# Altium PCB TIDA-010954-RevB.PcbDoc (part 8 of 8)
Units mm, origin at the board's own origin, x right, y up, seen from the top; angles counter-clockwise.
Board outline 290 x 100 mm, 6 copper layers (Top Layer, Mid1, Mid2, Mid3, Mid4, Bottom Layer), stack 1.59 mm thick; 394 components, 204 nets, 1137 pads, 2188 vias.
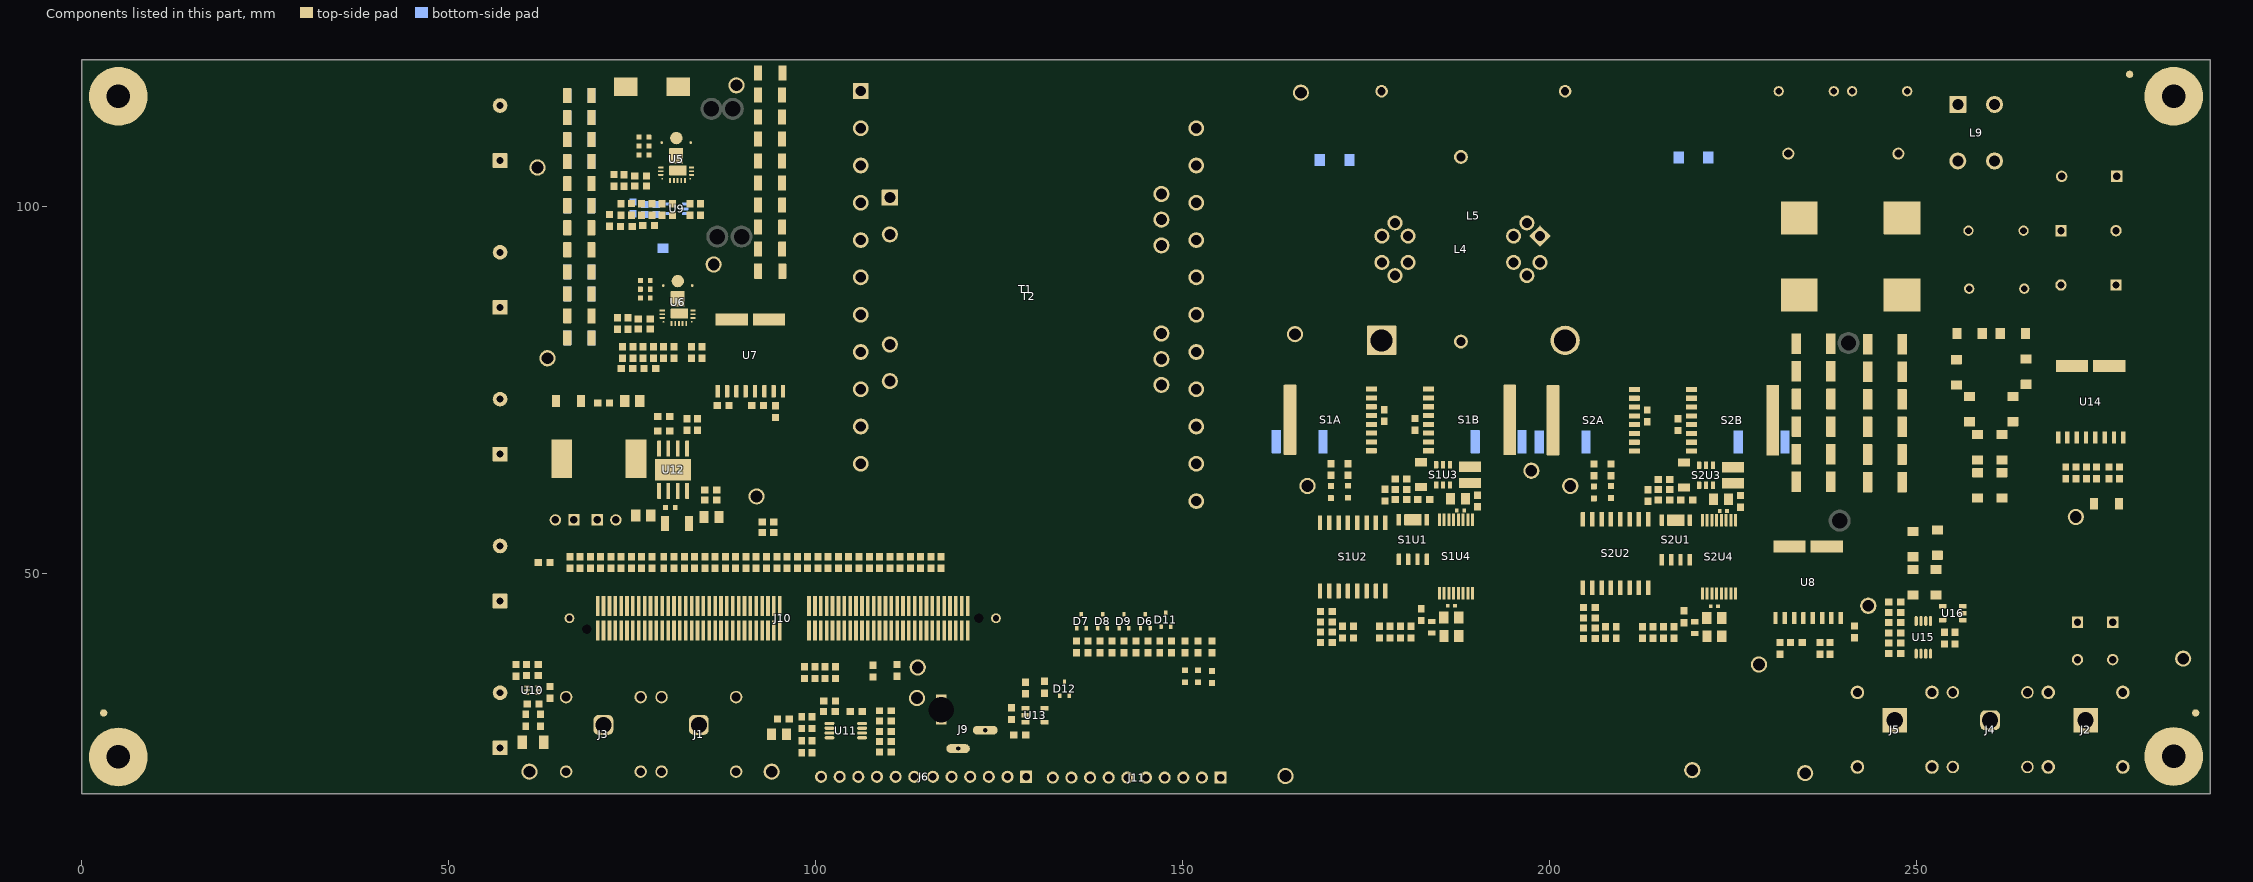
[diagram p10: the components of this part, seen from the top]

## Other copper
Top Layer:
  region net SW_L1: 82.8,106.2 85.383,106.2 90.7,111.517 90.7,114.9 85.3,114.9 82.8,112.4
  region net SW_L1: 93.1,90.2 93.1,119.2 90.6,119.2 90.6,111.769 85.4,106.569 85.4,94.3 87.1,94.3 91.2,90.2
  region net T1_1: 99.5,119.2 104.7,114 112,114 112,92.2 104.975,92.2 102.975,90.2 94.4,90.2 94.4,119.2
  region net SW_L2: 90.8,83.7 90.8,89.6 87.1,93.3 83,93.3 83,86.7 85.1,86.7 86.3,85.5 86.3,83.7
  region net T1_2: 91.3,83.7 91.3,89.5 103.9,89.5 104.975,88.425 112,88.425 112,68.6 103.1,68.6 97.3,74.4 97.3,83.3 96.9,83.7 93.2,83.7
  region net PGND: 65.3,80.4 67.1,80.4 67.1,116.5 65.3,116.5
  region net PGND: 58.1,27.3 58.1,25.2 55.9,25.2 55.9,27.3
  region net PVIN: 79.3,119 79.3,113.8 79.5,113.6 83.05,113.6 84.6,115.15 84.6,119
  region net DAB_POWER: 68.8,101.4 69.018,101.182 70.8,101.182 70.8,95 70.7,94.9 68.8,94.9
  region net DAB_POWER: 79.6,92.918 79.6,93.918 79.3,94.218 79.3,95.2 68.8,95.2 68.8,80.3 71.9,80.3 71.9,86.018 73.1,86.018 74.6,87.518 74.6,92.918
  region net DAB_POWER: 79.4,112.4 79.4,113.4 79.1,113.7 79.1,119 68.8,119 68.8,100.7 70.8,100.7 71.4,101.3 71.4,105.5 72.5,105.5 74.4,107.4 74.4,112.4
  region net PGND: 82.2,90.818 82.2,92.918 80.2,92.918 80.2,90.818
  region net DAB_POWER: 79.6,86.7 77.3,86.7 77.1,86.9 77.1,90.742 76.942,90.9 74.6,90.9 74.6,92.918 79.6,92.918
  region net PGND: 82,110.3 82,112.4 80,112.4 80,110.3
  region net DAB_POWER: 79.4,106.182 77.1,106.182 76.9,106.382 76.9,110.1 76.6,110.4 74.4,110.4 74.4,112.4 79.4,112.4
  region net PGND: 76.3,106.182 76.3,109.794 75,109.794 75,106.182
  pour cut-out: 77.9,72.5 77.8,72.4 62.9,72.4 62.9,58.7 77.9,58.7
  region net PGND: 60.4,25.4 60.4,27.9 59.68,28.8 58.8,28.8 58.8,25.4
  region net S1DA: 165.4,66.1 161,66.1 161,78.4 165.4,78.4
  region net S1DA: 247.3,90.2 247.3,61 249,61 251,63 251,90.2
  region net S2DB: 234.3,61 234.3,90.2 230.6,90.2 230.6,61
  region net S1S_SRC: 187.636,56.469 187.636,61.269 186.136,61.269 185.236,60.369 185.236,59.969 185.536,59.669 185.536,59.269 184.736,58.469 184.736,56.469
  region net GND: 186.772,40.446 189.772,40.446 189.772,48.146 186.772,48.146
  region net NetS1C13_2: 185.372,45.546 184.872,45.046 184.872,43.146 185.372,43.146 186.472,43.146 186.472,48.146 185.372,48.146
  region net S2DA: 205,84.3 205,79.2 191.4,79.2 191.4,84.3
  region net S2DA: 201.069,76.3 194,76.3 194,66.3 201.069,66.3
  region net N_M: 273.3,77.5 273.3,82.1 269,82.1 269,77.5
  region net NetF2_1: 274.1,77.5 274.1,90.1 274.9,90.9 275.1,90.9 278.3,90.9 278.4,90.8 278.4,77.5
  region net NetS2C13_2: 221.2,45.5 220.7,45 220.7,43.1 221.2,43.1 222.3,43.1 222.3,48.1 221.2,48.1
  region net GND: 222.6,40.4 225.6,40.4 225.6,48.1 222.6,48.1
  region net PVRTN: 63.1,28.525 63.4,28.825 63.4,29.4 66,32 74,32 74,24.2 63.8,24.2 63.1,24.9
  region net NetC100_2: 78.77,66.3 77.8,66.3 76.429,64.929 74.27,64.929 74.27,68.029 78.77,68.029
  region net MidHV: 239.9,53.8 239.9,52.9 235.5,52.9 235.5,55.7 235.5,57.5 237.6,59.6 237.6,61.1 244.2,61.1 244.2,60.6
  region net T1_4: 234.9,52.9 234.9,57.9 229.5,57.9 229.5,54.8 230.5,53.8 230.5,52.9
  region net MidHV: 244.2,61 237.6,61 237.6,82.7 244.2,82.7
  region net NetS1L1_1: 186.136,65.269 186.336,65.469 190.636,65.469 190.636,63.869 186.336,63.869 186.136,64.069
  region net S1S_5V: 189.936,62.969 189.936,60.469 189.436,59.969 189.436,58.469 189.636,58.269 189.636,56.469 188.036,56.469 188.036,58.969 187.936,59.083 187.936,61.269 187.636,61.569 186.136,61.569 186.136,62.969
  region net NetS2L1_1: 221.964,65.223 222.164,65.423 226.464,65.423 226.464,63.823 222.164,63.823 221.964,64.023
  region net S2S_5V: 225.764,62.923 225.764,60.423 225.264,59.923 225.264,58.423 225.464,58.223 225.464,56.423 223.864,56.423 223.864,58.923 223.764,59.037 223.764,61.223 223.464,61.523 221.964,61.523 221.964,62.923
  region net S2S_SRC: 223.464,56.423 223.464,61.223 221.964,61.223 221.064,60.323 221.064,59.923 221.364,59.623 221.364,59.223 220.564,58.423 220.564,56.423
  pour cut-out: 61.6,30 61.6,26.5 60.9,25.8 60.4,25.8 60.4,27.9 59.8,28.5 59.8,30
  region net PGND: 76.5,86.7 76.5,90.3 75.2,90.3 75.2,86.7
  text ".Layer_Name" at 14.656,-21.806 h1.52
Mid1:
  region net T1_2: 91.3,83.7 91.3,89.5 103.9,89.5 104.7,88.7 112,88.7 112,68.5 103,68.5 98.1,73.4 98.1,83 97.4,83.7 93.2,83.7
  pour cut-out: 83,93.208 85.4,95.108 85.4,105.916 82.8,105.916 82.8,112.4 89.9,119.5 112,119.5 112,67 102,67 97,72 97,83 88.902,83.098 83,89
  region net SW_L1: 82.8,106.2 85.256,106.2 90.4,111.344 90.4,114.9 85.3,114.9 82.8,112.4
  region net SW_L1: 93.1,90.2 93.1,119.175 90.6,119.175 90.6,111.116 85.4,105.916 85.4,94.3 87.1,94.3 91.2,90.2
  region net SW_L2: 90.8,83.7 90.8,89.6 87.1,93.3 83,93.3 83,86.7 85.1,86.7 86.3,85.5 86.3,83.7
  region net T1_1: 99.5,119.2 104.7,114 112,114 112,91.8 103.6,91.8 102,90.2 94.5,90.2 94.5,119.2
  pour cut-out: 77.9,72.5 77.8,72.4 62.9,72.4 62.9,58.7 77.9,58.7
  region net T1_3: 154.1,80.4 149.1,85.4 149.1,88 144,88 144,62.7 154.1,62.7
  region net PVRTN: 62.3,28.3 63.4,29.4 66,32 74,32 74,24.2 63.8,24.2 62.3,25.7
  pour cut-out: 162,70.5 162,78 231.5,78 231.5,70.5
  region net T1_3: 176.7,93.8 175.7,92.8 175.7,91.8 178.4,89.1 179.5,89.1 180.3,89.9 180.3,91 177.5,93.8
Mid2:
  region net SW_L2: 90.8,83.7 90.8,89.6 87.1,93.3 83,93.3 83,86.7 85.1,86.7 86.3,85.5 86.3,83.7
  region net T1_2: 91.3,83.7 91.3,89.5 103.9,89.5 104.7,88.7 112,88.7 112,68.5 103,68.5 98.1,73.4 98.1,83 97.4,83.7 93.2,83.7
  region net SW_L1: 93.1,90.2 93.1,119.2 90.6,119.2 90.6,111.769 85.4,106.569 85.4,94.3 87.1,94.3 91.2,90.2
  region net SW_L1: 82.8,106.2 85.383,106.2 90.7,111.517 90.7,114.9 85.3,114.9 82.8,112.4
  region net T1_1: 99.5,119.2 104.7,114 112,114 112,92.2 104.975,92.2 102.975,90.2 94.4,90.2 94.4,119.2
  region net PGND: 55.404,29.156 60.004,29.156 60.604,28.556 60.604,25.056 60.004,24.456 55.404,24.456
  region net PVIN: 56,114.8 56,112.7 58,112.7 58,114.8
  pour cut-out: 83,93.208 85.4,95.108 85.4,105.916 82.8,105.916 82.8,112.4 89.9,119.5 112,119.5 112,67 102,67 97,72 97,83 88.902,83.098 83,89
  pour cut-out: 77.9,72.5 77.8,72.4 62.9,72.4 62.9,58.7 77.9,58.7
  pour cut-out: 162,70.5 162,78 231.5,78 231.5,70.5
  region net PVIN: 82,32 86,32 86,27 82,27
Mid3:
  region net SW_L1: 82.8,106.2 85.383,106.2 90.7,111.517 90.7,114.9 85.3,114.9 82.8,112.4
  region net SW_L1: 93.1,90.2 93.1,119.2 90.6,119.2 90.6,111.769 85.4,106.569 85.4,94.3 87.1,94.3 91.2,90.2
  region net T1_1: 99.5,119.2 104.7,114 112,114 112,92.2 104.975,92.2 102.975,90.2 94.4,90.2 94.4,119.2
  region net T1_2: 91.3,83.7 91.3,89.5 103.9,89.5 104.7,88.7 112,88.7 112,68.5 103,68.5 98.1,73.4 98.1,83 97.4,83.7 93.2,83.7
  region net SW_L2: 90.8,83.7 90.8,89.6 87.1,93.3 83,93.3 83,86.7 85.1,86.7 86.3,85.5 86.3,83.7
  region net PVIN: 56,34.9 56,32.3 58.2,32.3 58.2,34.9
  region net PGND: 55.4,29.2 60,29.2 60.6,28.6 60.6,25.1 60,24.5 55.4,24.5
  pour cut-out: 83,93.208 85.4,95.108 85.4,105.916 82.8,105.916 82.8,112.4 89.9,119.5 112,119.5 112,67 102,67 97,72 97,83 88.902,83.098 83,89
  pour cut-out: 83,93.208 85.4,95.108 85.4,105.916 82.8,105.916 82.8,112.4 89.9,119.5 112,119.5 112,67 102,67 97,72 97,83 88.902,83.098 83,89
  region net PVIN: 82.1,31.2 85.9,31.2 85.9,27.5 82.1,27.5
  region net S1DA: 247.3,82.7 247.3,61 251,61 251,82.7
  region net N_M: 273.3,77.5 273.3,82.1 269,82.1 269,77.5
Mid4:
  region net T1_1: 99.5,119.2 104.7,114 112,114 112,92.2 104.975,92.2 102.975,90.2 94.4,90.2 94.4,119.2
  region net T1_2: 91.3,83.7 91.3,89.5 103.9,89.5 104.975,88.425 112,88.425 112,68.6 103.1,68.6 97.3,74.4 97.3,83.3 96.9,83.7 93.2,83.7
  region net SW_L2: 90.8,83.7 90.8,89.6 87.1,93.3 83,93.3 83,86.7 85.1,86.7 86.3,85.5 86.3,83.7
  region net SW_L1: 93.1,90.2 93.1,119.2 90.6,119.2 90.6,111.769 85.4,106.569 85.4,94.3 87.1,94.3 91.2,90.2
  region net SW_L1: 82.8,106.2 85.383,106.2 90.7,111.517 90.7,114.9 85.3,114.9 82.8,112.4
  region net PVIN: 56,34.8 56,32.7 58,32.7 58,34.8
  region net PGND: 56,47.3 56,45.2 58,45.2 58,47.3
  region net PVIN: 56,54.8 56,52.7 58,52.7 58,54.8
  region net PGND: 56,67.3 56,65.2 58,65.2 58,67.3
  region net PVIN: 56,74.8 56,72.7 57.5,72.7 57.5,74.8
  region net PGND: 56,87.3 56,85.2 58,85.2 58,87.3
  region net PVIN: 56,94.8 56,92.7 57.204,92.7 57.204,94.8
  region net PGND: 56,107.3 56,105.2 58,105.2 58,107.3
  region net PVIN: 56,114.8 56,112.7 58,112.7 58,114.8
  pour cut-out: 83,93.208 85.4,95.108 85.4,105.916 82.8,105.916 82.8,112.4 89.9,119.5 112,119.5 112,67 102,67 97,72 97,83 88.902,83.098 83,89
  region net T1_4: 144,88.7 153.8,88.7 153.8,108.7 144,108.7
  region net PVIN: 85.7,31.2 85.7,27.7 82.4,27.7 82.4,31.2
Bottom Layer:
  region net T1_2: 91.3,83.7 91.3,89.5 103.9,89.5 104.975,88.425 112,88.425 112,68.6 103.1,68.6 97.3,74.4 97.3,83.3 96.9,83.7 93.2,83.7
  region net SW_L2: 90.8,83.7 90.8,89.6 87.1,93.3 83,93.3 83,86.7 85.1,86.7 86.3,85.5 86.3,83.7
  region net T1_1: 99.5,119.2 104.7,114 112,114 112,92.2 104.975,92.2 102.975,90.2 94.4,90.2 94.4,119.2
  region net SW_L1: 93.1,92.3 93.1,119.2 90.6,119.2 90.6,111.35 85.4,106.15 85.4,94.3 87.1,94.3 89.1,92.3
  region net SW_L1: 83,106.2 85.633,106.2 90.7,111.267 90.7,114.9 85.3,114.9 83,112.6
  region net PGND: 65.3,83.75 67.027,83.75 67.027,80.5 65.3,80.5
  region net PGND: 65.3,89.75 67.027,89.75 67.027,86.5 65.3,86.5
  region net PGND: 65.3,92.75 67.027,92.75 67.027,89.5 65.3,89.5
  region net PGND: 65.3,101.75 67.027,101.75 67.027,98.5 65.3,98.5
  region net PGND: 65.3,116.385 66.96,116.385 66.96,104.345 65.3,104.345
  region net DAB_POWER: 68.75,101.75 70,101.75 70,98.5 68.75,98.5
  region net DAB_POWER: 68.75,83.75 70,83.75 70,80.5 68.75,80.5
  region net DAB_POWER: 70.1,92.9 68.7,92.9 68.7,86.25 70.1,86.25
  region net DAB_POWER: 68.7,116.3 70.2,116.3 70.2,104.345 68.7,104.345
  pour cut-out: 83,93.208 85.4,95.108 85.4,105.916 82.8,105.916 82.8,112.4 89.9,119.5 112,119.5 112,67 102,67 97,72 97,83 88.902,83.098 83,89
  region net S1S_SRC: 168.572,69.946 168.572,66.046 170.172,66.046 170.172,69.946
  region net S1S_SRC: 190.4,65.972 190.4,69.872 188.8,69.872 188.8,65.972
  region net S1S_SRC: 168.572,69.946 168.572,66.046 170.172,66.046 170.172,69.946
  region net S1DA: 165.4,66.1 157,66.1 157,78.4 165.4,78.4
  region net S1S_SRC: 190.4,65.972 190.4,69.872 188.8,69.872 188.8,65.972
  region net S2DB: 235.5,61 235.5,89.9 229.765,89.9 229.765,61
  region net S2DA: 191.3,84.8 205.2,84.8 205.2,80.9 201.2,76.8 201.2,65.8 193.8,65.8 193.8,76.8 191.3,79.3
  region net PVRTN: 63.1,28.525 63.1,29.1 66,32 74,32 74,24.2 63.8,24.2 63.1,24.9
  text ".Layer_Name" at 14.656,-21.806 h1.52

## Silkscreen, mask and mechanical layers (free items; w line width, h text height)
Top Overlay:
  drawing of 227 lines, arcs and shapes, not listed
  text "+" at 56.8,115.7 h0.6
  text "-" at 56.8,103.7 h0.6
  text "+" at 56.8,95.7 h0.6
  text "Danger High Voltage" at 284.066,88.8 h2 r270
  text "-" at 56.8,83.7 h0.6
  text "+" at 56.8,75.7 h0.6
  text "-" at 56.8,63.7 h0.6
  text "+" at 56.8,55.7 h0.6
  text "230VAC 4A max" at 257.9,46.9 h2
  text "-" at 56.8,43.7 h0.6
  text "60V 16A max" at 67.6,37.4 h2
  text "+" at 56.8,35.7 h0.6
  text "-" at 70.6,35.1 h2
  text "+" at 83.5,35.067 h2
  text "'.PRJ_Number'.PCB_Rev" at 220.2,27.6 h1.5
  text "-" at 53.8,23.7 h0.6
  text ".Layer_Name" at 14.656,-21.806 h1.52
Bottom Overlay:
  lines w0.1: 85.3,106 90.5,111.2 90.5,115
  text ".Layer_Name" at 14.656,-21.806 h1.52
Top Paste:
  text ".Layer_Name" at 14.656,-21.806 h1.52
Bottom Paste:
  text ".Layer_Name" at 14.656,-21.806 h1.52
Top Solder:
  region: 98,117 98,92 100,92 100,117
  region: 78.6,87.318 78,87.318 78,90.418 77.2,91.218 74.8,91.218 74.8,92.5 78.6,92.5
  region: 92,89 92,87 97,87 99,85 99,72 102,69 103,69 103,88 102,89
  region: 85,90 89,90 90,89 90,86 87,86 87,87 86,88 85,88
  region: 78.4,106.8 77.8,106.8 77.8,109.9 77,110.7 74.6,110.7 74.6,112 78.4,112
  region: 239.1,60.4 239.1,61.6 242.5,61.6 242.5,60.4
  text ".Layer_Name" at 14.656,-21.806 h1.52
  text ".Layer_Name" at 14.656,-21.806 h1.52
Bottom Solder:
  text ".Layer_Name" at 14.656,-21.806 h1.52
Drill Guide:
  text ".Layer_Name" at 14.656,-21.806 h1.52
M1 Board Outline:
  the board outline again, w0.254
  text ".Layer_Name" at 14.656,-21.806 h1.52
M2 Board Dimensions:
  rectangle: 0,-6.985 3.175,-3.81
  rectangle: 3.175,-10.16 12.7,-6.985
  lines w0.178: 0,-6.985 25.4,-6.985 ; 3.175,-10.16 3.175,-3.81 ; 6.35,-10.16 6.35,-3.81 ; 12.7,-10.16 12.7,-3.81 ; 19.05,-10.16 19.05,-3.81 ; 0,-10.16 25.4,-10.16 25.4,-3.81 0,-3.81 0,-10.16
  text ".Layer_Name" at 14.656,-21.806 h1.52
M3 3D STEP Top:
  text ".Layer_Name" at 14.656,-21.806 h1.52
M4 3D STEP Bottom:
  text ".Layer_Name" at 14.656,-21.806 h1.52
M5 Assembly Top:
  lines w0.254: -7.417,-23.626 160.223,-23.626 ; -7.417,-18.462 160.274,-18.462 ; -7.417,-13.297 -7.417,-28.791 94.31,-28.791 160.274,-28.791 160.274,-13.297 -7.404,-13.297 -7.404,-28.791 32.614,-28.791 ; 55.194,-28.791 55.194,-13.297 ; 87.376,-18.462 87.376,-13.297 ; 108.712,-18.462 108.712,-13.297 ; 124.511,-28.956 124.511,-23.804
  text "COMPONENTS MARKED 'DNP' SHOULD NOT BE POPULATED." at 29.299,-8.09 h1.52
  text "ASSEMBLY VARIANT:" at 29.286,-11.024 h1.52
  text ".VariantName" at 55.601,-11.024 h1.52
  text "PCB VIEWED FROM TOP SIDE" at -5.804,-16.654 h1.52
  text "BOARD #:" at 57.099,-16.654 h1.52
  text ".PRJ_Number" at 70.955,-16.654 h1.52
  text "REV:" at 92.405,-16.654 h1.52
  text ".PCB_Rev" at 99.809,-16.654 h1.52
  text "SVN REV:" at 113.69,-16.654 h1.52
  text ".VersionControl_RevNumber" at 126.543,-16.654 h1.52
  text "TID #:" at 57.099,-21.819 h1.52
  text ".TID" at 70.955,-21.819 h1.52
  text "PLOT NAME =" at -5.804,-27.034 h1.52
  text ".plot_File_Name" at 14.656,-27.034 h1.52
  text "GENERATED    :" at 57.15,-27.034 h1.52
  text ".Print_Date" at 79.235,-27.034 h1.52
  text ".Print_Time" at 97.752,-27.034 h1.52
  text "TEXAS INSTRUMENTS" at 129.87,-27.034 h1.52
M6 Assembly Bottom:
  lines w0.254: -7.429,-18.474 160.261,-18.474 ; -7.379,-23.639 160.261,-23.639 ; 28.334,-28.969 28.334,-23.817 ; 44.133,-18.474 44.133,-13.31 ; 65.468,-18.474 65.468,-13.31 ; 97.65,-28.804 97.65,-13.31 ; 120.231,-28.804 160.249,-28.804 160.249,-13.31 -7.429,-13.31 -7.429,-28.804 58.534,-28.804 160.261,-28.804 160.261,-13.31
  text "COMPONENTS MARKED 'DNP' SHOULD NOT BE POPULATED." at 154.991,-8.077 h1.52
  text ".VariantName" at 128.473,-11.024 h1.52
  text "ASSEMBLY VARIANT:" at 154.864,-11.024 h1.52
  text ".VersionControl_RevNumber" at 26.302,-16.667 h1.52
  text "SVN REV:" at 39.154,-16.667 h1.52
  text ".PCB_Rev" at 53.035,-16.667 h1.52
  text "REV:" at 60.439,-16.667 h1.52
  text ".PRJ_Number" at 81.89,-16.667 h1.52
  text "BOARD #:" at 95.745,-16.667 h1.52
  text "PCB VIEWED FROM BOTTOM SIDE" at 158.648,-16.667 h1.52
  text ".TID" at 81.89,-21.831 h1.52
  text "TID #:" at 95.745,-21.831 h1.52
  text "TEXAS INSTRUMENTS" at 22.974,-27.047 h1.52
  text ".Print_Time" at 55.093,-27.047 h1.52
  text ".Print_Date" at 73.609,-27.047 h1.52
  text "GENERATED    :" at 95.694,-27.047 h1.52
  text ".plot_File_Name" at 138.189,-27.047 h1.52
  text "PLOT NAME =" at 158.648,-27.047 h1.52
M9 Title Sheet:
  drawing of 57 lines, arcs and shapes, not listed
  text "1" at 18.792,204.127 h1.78
  text "2" at 82.182,204.127 h1.78
  text "3" at 145.411,204.127 h1.78
  text "4" at 209.08,204.127 h1.78
  text "5" at 272.555,204.127 h1.78
  text "6" at 336.182,204.127 h1.78
  text "A" at -10.579,175.095 h1.78
  text "A" at 365.341,175.095 h1.78
  text "B" at -10.579,114.643 h1.78
  text "B" at 365.341,114.643 h1.78
  text "C" at -10.579,54.318 h1.78
  text "C" at 365.341,54.318 h1.78
  text "PROJECT TITLE:" at 288.125,7.048 h1.14
  text ".PRJ_Title" at 289.395,3.662 h1.78
  text "DESIGNED FOR:" at 288.125,-0.597 h1.14
  text ".PRJ_Customer" at 289.395,-4.153 h1.78
  text "D" at -10.579,-5.88 h1.78
  text "D" at 365.341,-5.88 h1.78
  text "FILE NAME:" at 288.125,-8.217 h1.14
  text ".PCB_File_Name_No_Path" at 289.395,-11.265 h1.78
  text "Texas Instruments (TI) and/or its licensors do not warrant the accuracy or completeness of this specification" at 161.9,-15.376 h1.14
  text "ENGINEER:" at 288.125,-15.583 h1.14
  text "LAYOUT BY:" at 326.352,-15.583 h1.14
  text "or any information contained therein. TI and/or its licensors do not warrant that this design will meet" at 160.757,-18.237 h1.14
  text ".PRJ_Engineer" at 289.395,-19.52 h1.78
  text ".PCB_Layout" at 327.635,-19.52 h1.78
  text "the specifications, will be suitable for your application or fit for any particular purpose, or will operate in" at 160.757,-21.099 h1.14
  text ".Layer_Name" at 14.656,-21.806 h1.52
  text "ALTIUM DESIGNER VERSION:" at 326.352,-23.457 h1.14
  text "an implementation. TI and/or its licensors do not warrant that the design is production worthy. You should" at 160.757,-23.961 h1.14
  text "completely validate and test your design implementation to confirm the system functionality for your application." at 161.9,-26.822 h1.14
  text ".print_Scale" at 289.395,-26.843 h1.78
  text ".Application_BuildNumber" at 327.635,-26.843 h1.78
  text "1" at 18.792,-32.093 h1.78
  text "2" at 82.182,-32.093 h1.78
  text "3" at 145.411,-32.093 h1.78
  text "4" at 209.08,-32.093 h1.78
  text "5" at 272.555,-32.093 h1.78
  text "6" at 336.182,-32.093 h1.78
M10 Fab Notes:
  drawing of 189 lines, arcs and shapes, not listed
  text "DESIGN INFORMATION" at 314.503,161.447 h1.52
  text "MIN. TRACK WIDTH:" at 298.131,158.091 h1.52
  text "8" at 325.976,158.091 h1.52
  text "MIL" at 329.907,158.091 h1.52
  text "7.874" at 321.75,155 h1.52
  text "MIN. CLEARANCE:" at 298.131,154.938 h1.52
  text "MIL" at 329.907,154.938 h1.52
  text "MIN. VIA PAD SIZE:" at 298.131,151.785 h1.52
  text "24" at 325.214,151.785 h1.52
  text "MIL" at 329.907,151.785 h1.52
  text "0.05mm (2MIL)" at 315.784,148.486 h1.52
  text "MINIMUM ANNULAR RING" at 289.769,148.277 h1.52
  text "EXTERNAL" at 333.768,148.277 h1.52
  text "PER" at 294.849,145.48 h1.52
  text "IPC-D-275 CLASS 2 LEVEL C" at 300.437,145.48 h1.52
  text "MIL, HOLES" at 338.238,142.928 h1.52
  text "+/-" at 328.27,142.709 h1.52
  text "+/-" at 349.961,142.709 h1.52
  text "REGISTRATION TOLERANCES:" at 289.769,142.682 h1.52
  text "METAL" at 320.243,142.682 h1.52
  text "5" at 334.879,142.683 h1.52
  text "3" at 356.037,142.683 h1.52
  text "MIL" at 358.99,142.682 h1.52
  text "HOLE SIZE TOLERANCE (UNLESS OTHERWISE SPECIFIED):" at 289.769,140.185 h1.52
  text "+/-" at 349.961,140.112 h1.52
  text "3" at 356.037,140.085 h1.52
  text "MIL" at 358.99,140.085 h1.52
  text "MATERIAL:" at 287.87,136.589 h1.52
  text "FR-4 High Tg" at 312.926,133.324 h1.52
  text "X" at 309.257,133.122 h1.52
  text "FR-4" at 298.563,133.007 h1.52
  text "OTHER" at 336.358,133.007 h1.52
  text "62 MIL (1.6mm) +/-10%" at 306.694,129.374 h1.52
  text "X" at 303.643,129.312 h1.52
  text "THICKNESS:" at 289.769,129.165 h1.52
  text "OTHER" at 339.33,129.165 h1.52
  text "TOLERANCE:" at 289.769,125.652 h1.52
  text "X" at 311.314,125.652 h1.52
  text "ANSI IPC-6012 TYPE 3 CLASS 2" at 315.836,125.652 h1.52
  text "OTHER +/-" at 315.835,121.989 h1.52
  text "BOW & TWIST:" at 289.769,118.302 h1.52
  text "X" at 311.314,118.302 h1.52
  text "ANSI IPC-6012 TYPE 3 CLASS 2" at 315.836,118.302 h1.52
  text "OTHER +/-" at 315.835,114.576 h1.52
  text "DRILLING:" at 287.87,111.258 h1.52
  text "NC_DRILL FILES" at 332.599,108.586 h1.52
  text "REFERENCE:" at 289.769,108.486 h1.52
  text "X" at 306.463,108.484 h1.52
  text "AS SHOWN" at 310.984,108.486 h1.52
  text "X" at 329.348,108.486 h1.52
  text "OTHER" at 340.168,104.873 h1.52
  text "PTH COPPER THICKNESS:" at 289.761,104.783 h1.52
  text "X" at 318.697,104.783 h1.52
  text "20-30 um" at 321.948,104.783 h1.52
  text "BOARD FINISH:" at 287.87,101.034 h1.52
  text "SILKSCREEN:" at 291.812,98.237 h1.52
  text "X" at 316.14,98.237 h1.52
  text "TOP" at 319.112,98.237 h1.52
  text "X" at 329.094,98.237 h1.52
  text "BOTTOM" at 332.091,98.237 h1.52
  text "SILKSCREEN COLOR:" at 291.812,94.295 h1.52
  text "X" at 316.115,94.295 h1.52
  text "WHITE" at 319.112,94.295 h1.52
  text "OTHER" at 332.091,94.295 h1.52
  text "X" at 319.442,90.652 h1.52
  text "GREEN" at 322.439,90.652 h1.52
  text "OTHER" at 338.136,90.652 h1.52
  text "SOLDER RESIST COLOR:" at 291.812,90.477 h1.52
  text "X" at 319.442,86.734 h1.52
  text "MATTE" at 322.439,86.734 h1.52
  text "SEMI-GLOSS" at 338.125,86.717 h1.52
  text "IMMERSION GOLD (ENIG)" at 314.819,82.345 h1.52
  text "ENEPIG" at 348.793,82.162 h1.52
  text "SURFACE FINISH:" at 287.87,82.136 h1.52
  text "X" at 310.298,82.136 h1.52
  text "IMM. TIN/SILVER OR EQUIV" at 296.24,78.649 h1.52
  text "OTHER" at 332.599,78.549 h1.52
  text "ARRAY/PANEL:" at 287.87,74.602 h1.52
  text "CUT AND TRIM PER M1 BOARD OUTLINE" at 314.819,74.393 h1.52
  text "N.C. ROUTE" at 314.819,70.94 h1.52
  text "X" at 332.295,70.94 h1.52
  text "V. SCORE" at 336.816,70.94 h1.52
  text "CERTIFICATION:" at 287.87,67.66 h1.52
  text "MATERIALS AND WORKMANSHIP FOR ALL PCBS" at 306.285,67.66 h1.52
  text "TO MEET OR EXCEED THE REQUIREMENTS OF:" at 306.285,65.271 h1.52
  text "X" at 297.078,62.003 h1.52
  text "ANSI IPC-A-600F CLASS ->" at 300.329,62.003 h1.52
  text "X" at 342.188,62.003 h1.52
  text "2" at 344.982,62.003 h1.52
  text "1" at 336.981,61.965 h1.52
  text "3" at 353.973,61.965 h1.52
  text "X" at 317.702,58.252 h1.52
  text "RoHS" at 320.953,58.252 h1.52
  text "OTHER" at 337.321,58.252 h1.52
  text "PER ORDER" at 347.407,58.252 h1.52
  text "ALL BOARDS MUST MEET OR EXCEED UL94-V0 REQUIREMENTS." at 288.569,54.345 h1.52
  text "PCB MUST BEAR THE UL94V-0 UL REGISTERED MATERIAL ID NUMBER" at 288.569,51.397 h1.52
  text "ADDITIONAL REQUIREMENTS:" at 287.87,47.094 h1.52
  text "MICROSECTION:" at 289.769,44.373 h1.52
  text "YES" at 312.775,44.373 h1.52
  text "REQUIRED" at 334.657,40.707 h1.52
  text "BARE BOARD ELEC. TEST:" at 289.769,40.634 h1.52
  text "NONE" at 322.935,40.634 h1.52
  text "X" at 331.66,40.634 h1.52
  text "PER ORDER" at 349.693,40.634 h1.52
  text "XX MIL VIAS REQUIRE NON-CONDUCTIVE FILL AND PLANARIZE" at 294.04,35.428 h1.5
  text "XX MIL VIAS REQUIRE CONDUCTIVE FILL AND PLANARIZE" at 294.243,32.787 h1.52
  text "OUTER XX MIL TRACES REQUIRE 50 OHM SINGLE-ENDED IMPEDANCE" at 294.218,28.637 h1.47
  text "LAYER 2 & 3 (INNER LAYERS) XX MIL WIDE, XX MIL SPACE / TRACES REQUIRE 100 OHM DIFFERENTIAL IMPEDANCE" at 294.015,22.65 h1.52
  text ".Layer_Name" at 14.656,-21.806 h1.52
M11 Gerber Information:
  lines w0.254: -7.417,-23.626 160.223,-23.626 ; -7.417,-18.462 160.274,-18.462 ; -7.417,-13.297 -7.417,-28.791 94.31,-28.791 160.274,-28.791 160.274,-13.297 -7.404,-13.297 -7.404,-28.791 32.614,-28.791 ; 55.194,-28.791 55.194,-13.297 ; 87.376,-18.462 87.376,-13.297 ; 108.712,-18.462 108.712,-13.297 ; 124.511,-28.956 124.511,-23.804
  text "ALL ARTWORK VIEWED FROM TOP SIDE" at -5.804,-16.654 h1.52
  text "BOARD #:" at 57.099,-16.654 h1.52
  text ".PRJ_Number" at 70.955,-16.654 h1.52
  text "REV:" at 92.405,-16.654 h1.52
  text ".PCB_Rev" at 99.809,-16.654 h1.52
  text "SVN REV:" at 113.69,-16.654 h1.52
  text ".VersionControl_RevNumber" at 126.543,-16.654 h1.52
  text "LAYER NAME =" at -5.804,-21.806 h1.52
  text "TID #:" at 57.099,-21.819 h1.52
  text ".TID" at 70.955,-21.819 h1.52
  text "PLOT NAME =" at -5.804,-27.034 h1.52
  text ".plot_File_Name" at 14.656,-27.034 h1.52
  text "GENERATED    :" at 57.15,-27.034 h1.52
  text ".Print_Date" at 79.235,-27.034 h1.52
  text ".Print_Time" at 97.752,-27.034 h1.52
  text "TEXAS INSTRUMENTS" at 129.87,-27.034 h1.52
M12 Stackup:
  drawing of 503 lines, arcs and shapes, not listed
  text "Layer" at 249.469,200.023 h1.52
  text "Name" at 259.88,200.023 h1.52
  text "Material" at 283.496,200.023 h1.52
  text "Thickness" at 305.334,200.023 h1.52
  text "Constant" at 321.84,200.023 h1.52
  text "Board Layer Stack" at 336.314,200.023 h1.52
  text "Top Overlay" at 259.88,196.975 h1.52
  text "Top Solder" at 259.88,193.927 h1.52
  text "Solder Resist" at 283.496,193.927 h1.52
  text "0,40mil" at 305.334,193.927 h1.52
  text "3.5" at 321.84,193.927 h1.52
  text "1" at 249.469,190.879 h1.52
  text "Top Layer" at 259.88,190.879 h1.52
  text "2,76mil" at 305.334,190.879 h1.52
  text "Dielectric 1" at 259.88,187.831 h1.52
  text "PP-010" at 283.496,187.831 h1.52
  text "3,31mil" at 305.334,187.831 h1.52
  text "4" at 321.84,187.831 h1.52
  text "Dielectric 3" at 259.88,184.783 h1.52
  text "PP-006" at 283.496,184.783 h1.52
  text "2,11mil" at 305.334,184.783 h1.52
  text "4.1" at 321.84,184.783 h1.52
  text "2" at 249.469,181.735 h1.52
  text "Mid1" at 259.88,181.735 h1.52
  text "CF-004" at 283.496,181.735 h1.52
  text "2,40mil" at 305.334,181.735 h1.52
  text "Core1" at 259.88,178.687 h1.52
  text "Core-032" at 283.496,178.687 h1.52
  text "13,78mil" at 305.334,178.687 h1.52
  text "4.7" at 321.84,178.687 h1.52
  text "3" at 249.469,175.639 h1.52
  text "Mid2" at 259.88,175.639 h1.52
  text "CF-004" at 283.496,175.639 h1.52
  text "2,40mil" at 305.334,175.639 h1.52
  text "Dielectric 5" at 259.88,172.591 h1.52
  text "PP-006" at 283.496,172.591 h1.52
  text "2,11mil" at 305.334,172.591 h1.52
  text "4.1" at 321.84,172.591 h1.52
  text "Prepreg" at 259.88,169.543 h1.52
  text "FR-4 High Tg" at 283.496,169.543 h1.52
  text "4,88mil" at 305.334,169.543 h1.52
  text "4.8" at 321.84,169.543 h1.52
  text "Dielectric 7" at 259.88,166.495 h1.52
  text "PP-006" at 283.496,166.495 h1.52
  text "2,11mil" at 305.334,166.495 h1.52
  text "4.1" at 321.84,166.495 h1.52
  text "4" at 249.469,163.447 h1.52
  text "Mid3" at 259.88,163.447 h1.52
  text "CF-004" at 283.496,163.447 h1.52
  text "2,40mil" at 305.334,163.447 h1.52
  text "Core2" at 259.88,160.399 h1.52
  text "Core-032" at 283.496,160.399 h1.52
  text "13,78mil" at 305.334,160.399 h1.52
  text "4.7" at 321.84,160.399 h1.52
  text "5" at 249.469,157.351 h1.52
  text "Mid4" at 259.88,157.351 h1.52
  text "CF-004" at 283.496,157.351 h1.52
  text "2,40mil" at 305.334,157.351 h1.52
  text "Dielectric 4" at 259.88,154.303 h1.52
  text "PP-006" at 283.496,154.303 h1.52
  text "2,11mil" at 305.334,154.303 h1.52
  text "4.1" at 321.84,154.303 h1.52
  text "Dielectric 2" at 259.88,151.255 h1.52
  text "PP-010" at 283.496,151.255 h1.52
  text "3,31mil" at 305.334,151.255 h1.52
  text "4" at 321.84,151.255 h1.52
  text "6" at 249.469,148.207 h1.52
  text "Bottom Layer" at 259.88,148.207 h1.52
  text "2,76mil" at 305.334,148.207 h1.52
  text "Bottom Solder" at 259.88,145.159 h1.52
  text "Solder Resist" at 283.496,145.159 h1.52
  text "0,40mil" at 305.334,145.159 h1.52
  text "3.5" at 321.84,145.159 h1.52
  text "Bottom Overlay" at 259.88,142.111 h1.52
  text ".Layer_Name" at 14.656,-21.806 h1.52
M13 Component Bodies Top:
  text ".Layer_Name" at 14.656,-21.806 h1.52
M14 Component Bodies Bottom:
  text ".Layer_Name" at 14.656,-21.806 h1.52
M15 Courtyards Top:
  text ".Layer_Name" at 14.656,-21.806 h1.52
M16 Courtyards Bottom:
  text ".Layer_Name" at 14.656,-21.806 h1.52
Drill Drawing:
  drawing of 184 lines, arcs and shapes, not listed
  text "Symbol" at 165.256,198.153 h1.83
  text "Quantity" at 172.88,198.153 h1.83
  text "Finished Hole Size" at 181.305,198.153 h1.83
  text "Plated" at 197.455,198.153 h1.83
  text "Hole Type" at 204.029,198.153 h1.83
  text "Drill Layer Pair" at 213.547,198.153 h1.83
  text "Hole Tolerance" at 231.9,198.153 h1.83
  text "2" at 172.88,195.003 h1.52
  text "50.00mil (1.270mm)" at 181.305,195.003 h1.52
  text "NPTH" at 197.455,195.003 h1.52
  text "Round" at 204.029,195.003 h1.52
  text "Top Layer - Bottom Layer" at 213.547,195.003 h1.52
  text "C" at 164.615,194.749 h1.4
  text "2182" at 172.88,191.853 h1.52
  text "7.87mil (0.200mm)" at 181.305,191.853 h1.52
  text "PTH" at 197.455,191.853 h1.52
  text "Round" at 204.029,191.853 h1.52
  text "Top Layer - Bottom Layer" at 213.547,191.853 h1.52
  text "D" at 164.615,191.599 h1.4
  text "6" at 172.88,188.702 h1.52
  text "12.99mil (0.330mm)" at 181.305,188.702 h1.52
  text "PTH" at 197.455,188.702 h1.52
  text "Round" at 204.029,188.702 h1.52
  text "Top Layer - Bottom Layer" at 213.547,188.702 h1.52
  text "E" at 164.615,188.449 h1.4
  text "2" at 172.88,185.552 h1.52
  text "33.07mil (0.840mm)" at 181.305,185.552 h1.52
  text "PTH" at 197.455,185.552 h1.52
  text "Round" at 204.029,185.552 h1.52
  text "Top Layer - Bottom Layer" at 213.547,185.552 h1.52
  text "B" at 164.615,185.298 h1.4
  text "8" at 172.88,182.402 h1.52
  text "35.43mil (0.900mm)" at 181.305,182.402 h1.52
  text "PTH" at 197.455,182.402 h1.52
  text "Round" at 204.029,182.402 h1.52
  text "Top Layer - Bottom Layer" at 213.547,182.402 h1.52
  text "10" at 172.88,179.252 h1.52
  text "37.40mil (0.950mm)" at 181.305,179.252 h1.52
  text "PTH" at 197.455,179.252 h1.52
  text "Round" at 204.029,179.252 h1.52
  text "Top Layer - Bottom Layer" at 213.547,179.252 h1.52
  text "10" at 172.88,176.101 h1.52
  text "39.37mil (1.000mm)" at 181.305,176.101 h1.52
  text "PTH" at 197.455,176.101 h1.52
  text "Round" at 204.029,176.101 h1.52
  text "Top Layer - Bottom Layer" at 213.547,176.101 h1.52
  text "22" at 172.88,172.951 h1.52
  text "40.00mil (1.016mm)" at 181.305,172.951 h1.52
  text "PTH" at 197.455,172.951 h1.52
  text "Round" at 204.029,172.951 h1.52
  text "Top Layer - Bottom Layer" at 213.547,172.951 h1.52
  text "4" at 172.88,169.801 h1.52
  text "40.16mil (1.020mm)" at 181.305,169.801 h1.52
  text "PTH" at 197.455,169.801 h1.52
  text "Round" at 204.029,169.801 h1.52
  text "Top Layer - Bottom Layer" at 213.547,169.801 h1.52
  text "4" at 172.88,166.651 h1.52
  text "43.31mil (1.100mm)" at 181.305,166.651 h1.52
  text "PTH" at 197.455,166.651 h1.52
  text "Round" at 204.029,166.651 h1.52
  text "Top Layer - Bottom Layer" at 213.547,166.651 h1.52
  text "20" at 172.88,163.5 h1.52
  text "47.24mil (1.200mm)" at 181.305,163.5 h1.52
  text "PTH" at 197.455,163.5 h1.52
  text "Round" at 204.029,163.5 h1.52
  text "Top Layer - Bottom Layer" at 213.547,163.5 h1.52
  text "2" at 172.88,160.35 h1.52
  text "49.21mil (1.250mm)" at 181.305,160.35 h1.52
  text "PTH" at 197.455,160.35 h1.52
  text "Round" at 204.029,160.35 h1.52
  text "Top Layer - Bottom Layer" at 213.547,160.35 h1.52
  text "12" at 172.88,157.2 h1.52
  text "53.15mil (1.350mm)" at 181.305,157.2 h1.52
  text "PTH" at 197.455,157.2 h1.52
  text "Round" at 204.029,157.2 h1.52
  text "Top Layer - Bottom Layer" at 213.547,157.2 h1.52
  text "G" at 164.615,156.946 h1.4
  text "22" at 172.88,154.049 h1.52
  text "55.12mil (1.400mm)" at 181.305,154.049 h1.52
  text "PTH" at 197.455,154.049 h1.52
  text "Round" at 204.029,154.049 h1.52
  text "Top Layer - Bottom Layer" at 213.547,154.049 h1.52
  text "A" at 164.615,153.796 h1.4
  text "14" at 172.88,150.899 h1.52
  text "59.06mil (1.500mm)" at 181.305,150.899 h1.52
  text "PTH" at 197.455,150.899 h1.52
  text "Round" at 204.029,150.899 h1.52
  text "Top Layer - Bottom Layer" at 213.547,150.899 h1.52
  text "21" at 172.88,147.749 h1.52
  text "63.00mil (1.600mm)" at 181.305,147.749 h1.52
  text "PTH" at 197.455,147.749 h1.52
  text "Round" at 204.029,147.749 h1.52
  text "Top Layer - Bottom Layer" at 213.547,147.749 h1.52
  text "6" at 172.88,144.599 h1.52
  text "82.68mil (2.100mm)" at 181.305,144.599 h1.52
  text "PTH" at 197.455,144.599 h1.52
  text "Round" at 204.029,144.599 h1.52
  text "Top Layer - Bottom Layer" at 213.547,144.599 h1.52
  text "F" at 164.615,144.345 h1.4
  text "5" at 172.88,141.448 h1.52
  text "86.61mil (2.200mm)" at 181.305,141.448 h1.52
  text "PTH" at 197.455,141.448 h1.52
  text "Round" at 204.029,141.448 h1.52
  text "Top Layer - Bottom Layer" at 213.547,141.448 h1.52
  text "2" at 172.88,138.298 h1.52
  text "118.11mil (3.000mm)" at 181.305,138.298 h1.52
  text "PTH" at 197.455,138.298 h1.52
  text "Round" at 204.029,138.298 h1.52
  text "Top Layer - Bottom Layer" at 213.547,138.298 h1.52
  text "H" at 164.615,138.044 h1.4
  text "4" at 172.88,135.148 h1.52
  text "125.98mil (3.200mm)" at 181.305,135.148 h1.52
  text "PTH" at 197.455,135.148 h1.52
  text "Round" at 204.029,135.148 h1.52
  text "Top Layer - Bottom Layer" at 213.547,135.148 h1.52
  text "1" at 172.88,131.997 h1.52
  text "23.62mil (0.600mm)" at 181.305,131.997 h1.52
  text "PTH" at 197.455,131.997 h1.52
  text "Slot" at 204.029,131.997 h1.52
  text "Top Layer - Bottom Layer" at 213.547,131.997 h1.52
  text "1" at 172.88,128.847 h1.52
  text "23.62mil (0.600mm)" at 181.305,128.847 h1.52
  text "PTH" at 197.455,128.847 h1.52
  text "Slot" at 204.029,128.847 h1.52
  text "Top Layer - Bottom Layer" at 213.547,128.847 h1.52
  text "1" at 172.88,125.697 h1.52
  text "137.79mil (3.500mm)" at 181.305,125.697 h1.52
  text "PTH" at 197.455,125.697 h1.52
  text "Slot" at 204.029,125.697 h1.52
  text "Top Layer - Bottom Layer" at 213.547,125.697 h1.52
  text "2361 Total" at 172.88,122.547 h1.52
  text "Slot definitions :" at 165.256,120.341 h1.52
  text "Routed Path Length" at 176.671,120.341 h1.52
  text "= Calculated from tool start centre position to tool end centre position." at 190.346,120.341 h1.52
  text "Hole Length" at 176.671,119.081 h1.52
  text "= Routed Path Length + Tool Size = Slot length as defined in the PCB layout" at 185.283,119.081 h1.52
  text ".Layer_Name" at 14.656,-21.806 h1.52
M17 Embedded Cavity:
  text ".Layer_Name" at 14.656,-21.806 h1.52
M18 Embedded Assembly:
  text ".Layer_Name" at 14.656,-21.806 h1.52
M19 Embedded Keepout:
  text ".Layer_Name" at 14.656,-21.806 h1.52

## Dimensions
0,-10.16 to 25.4,-10.16 on M2 Board Dimensions
0,0 to 0,120 on M2 Board Dimensions
0,0 to 290,20 on M2 Board Dimensions

## Text inside footprints (layer, text, board x,y; h text height)
Logo3: Top Overlay "For evaluation only; not FCC approved for resale." at 159.9,31.25 h1.5
ZZ1: M5 Assembly Top "Install label in silkscreened box after final wash.  Text shall be 8 pt font.  Text shall be per the Label Table in the PDF schematic." at 4.092,153.267 h1.02